# Altium PCB Power.PcbDoc
Units mil, origin at the board's own origin, x right, y up, seen from the top; angles counter-clockwise.
Board outline 2755.91 x 2165.35 mil, 2 copper layers (Top Layer, Bottom Layer), stack 21 mil thick; 115 components, 62 nets, 289 pads, 583 vias.
Unrouted connection lines stored in the file: 32.
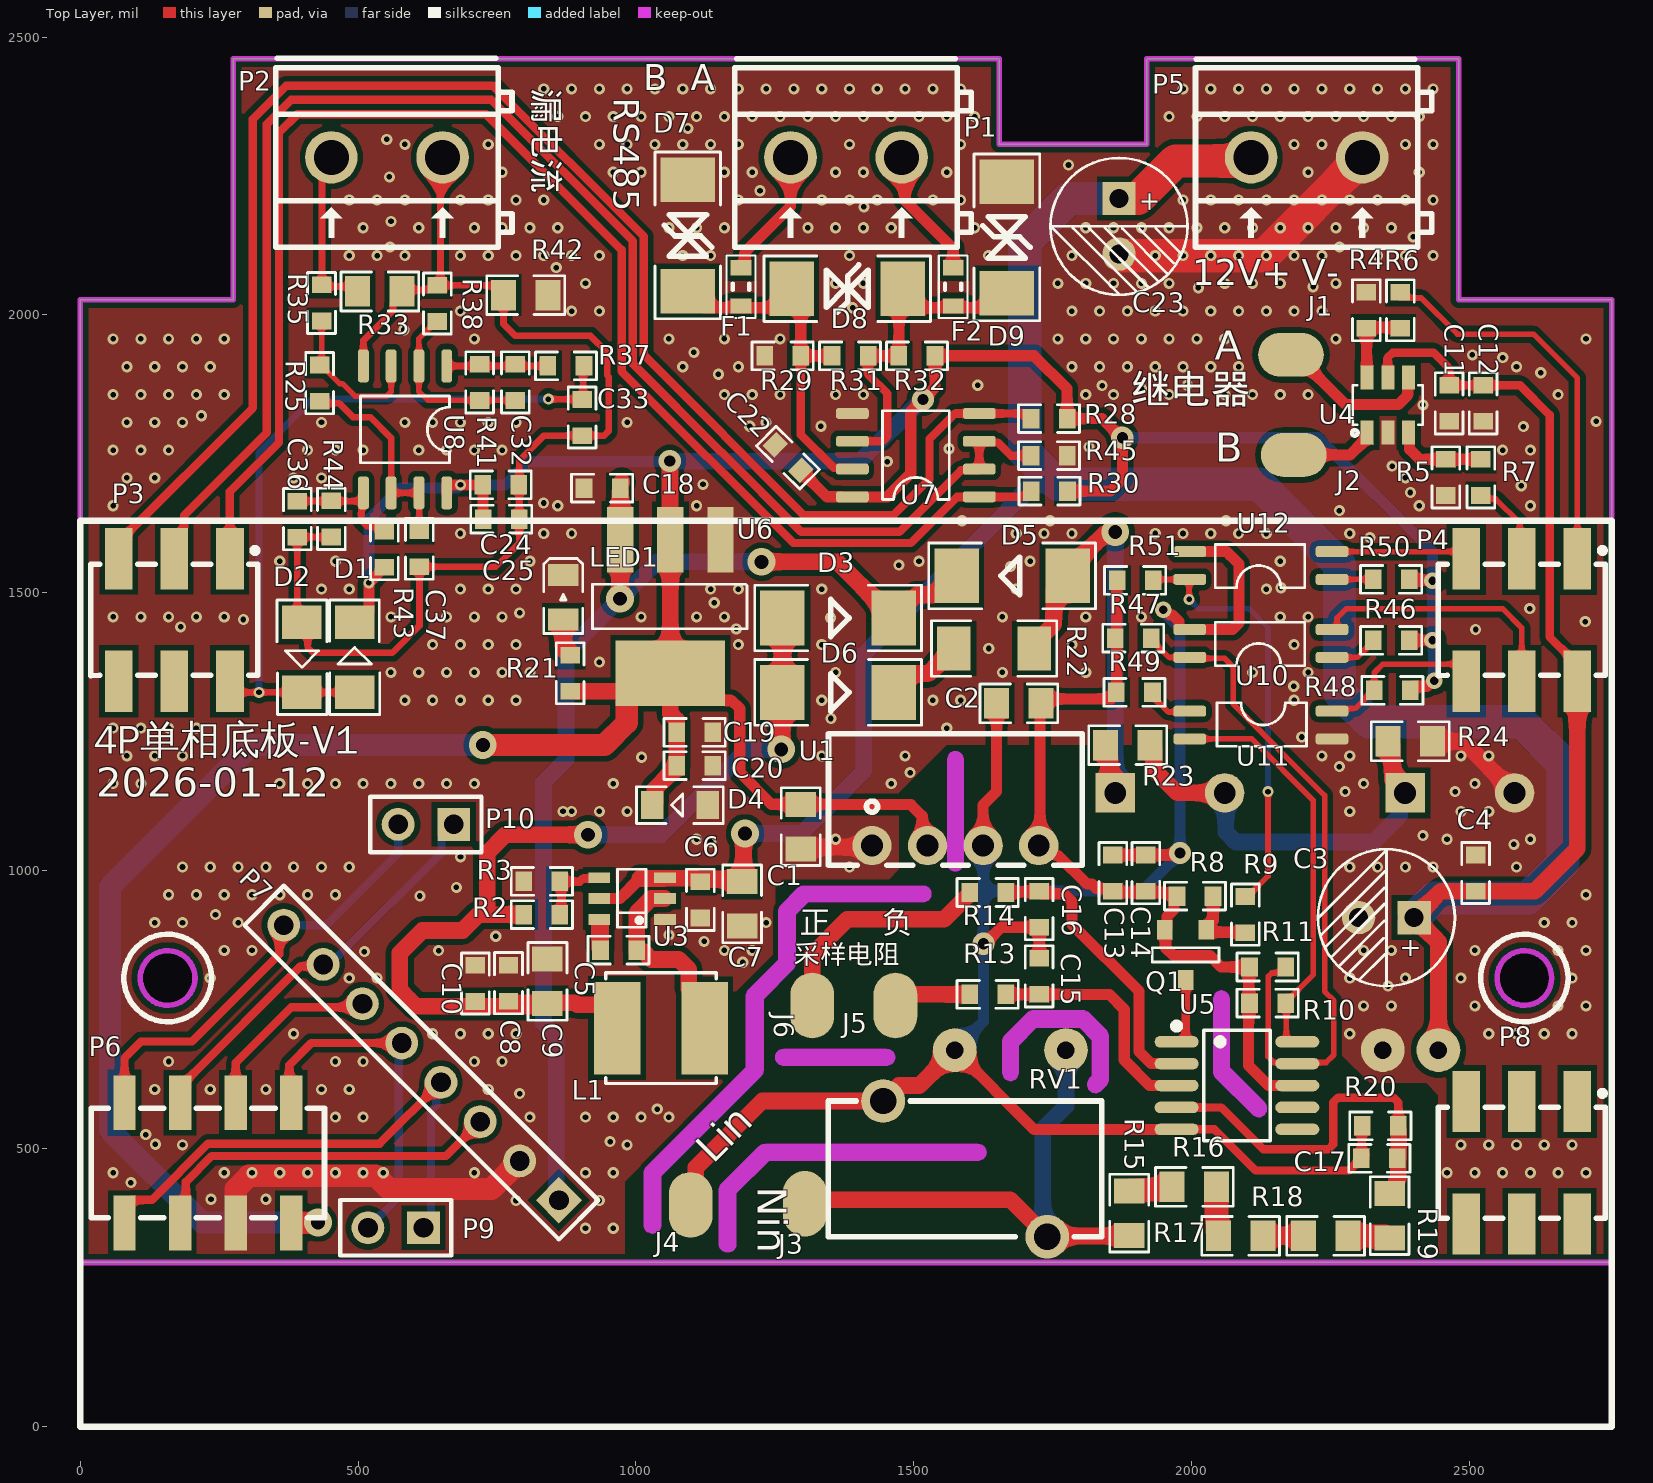
[diagram p0: Top Layer view]
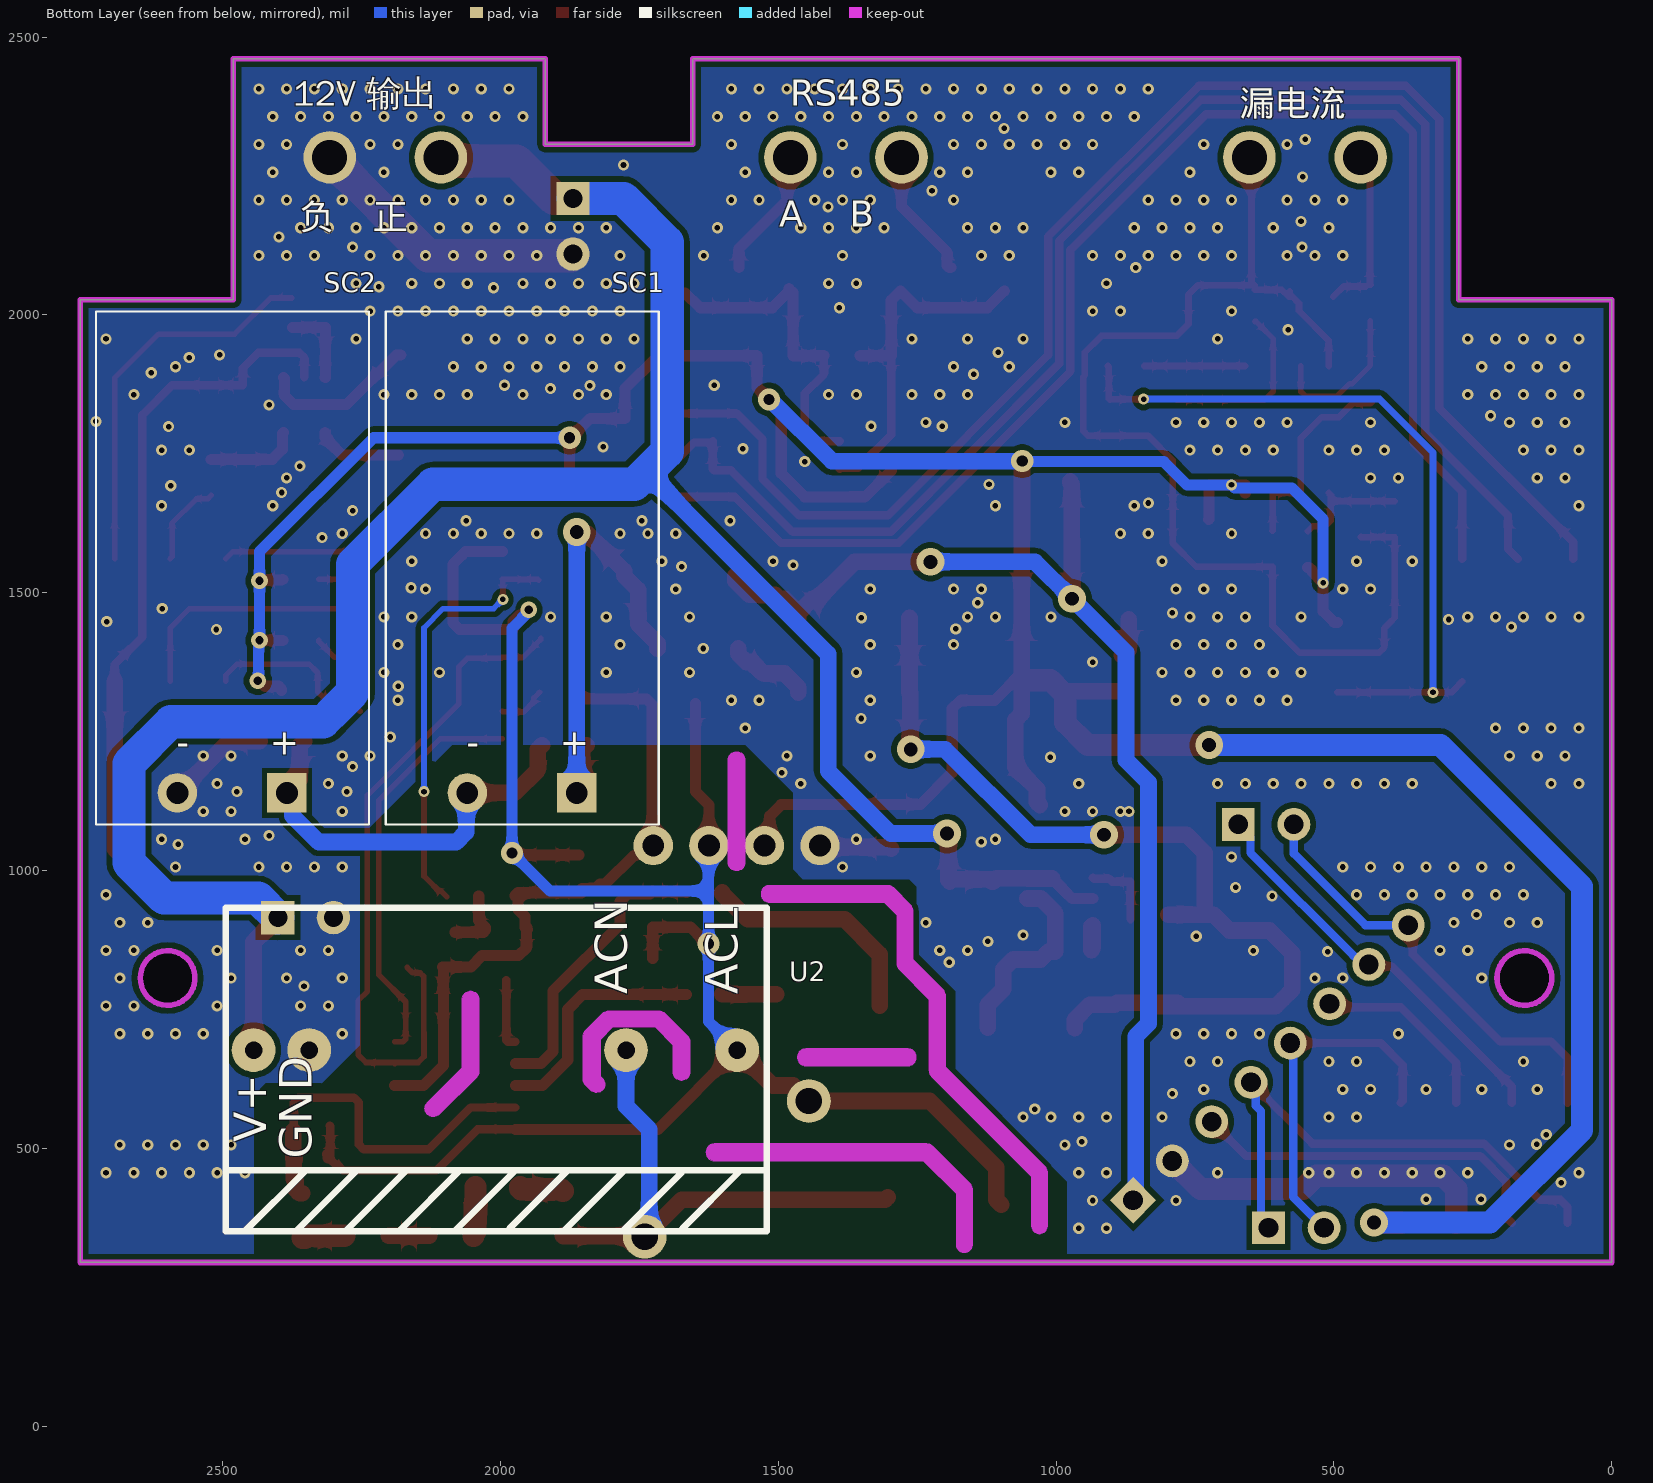
[diagram p1: Bottom Layer view, seen from below]

## Layer stack, top to bottom
Top Solder: solder mask 0.4, Solder Resist, Dk 3.5
Top Layer: signal copper 1.4
Dielectric 2: prepreg 2.8, Composite dielectric, Dk 4.1
Dielectric 1: prepreg 12.6, Composite dielectric, Dk 4.1
Dielectric 3: prepreg 2.8, Composite dielectric, Dk 4.1
Bottom Layer: signal copper 1.4
Bottom Solder: solder mask 0.4, Solder Resist, Dk 3.5

## Board outline
0,295.28 0,2027.56 275.59,2027.56 275.59,2460.63 1653.54,2460.63 1653.54,2307.45 1918.79,2307.45 1918.79,2460.13 1919.3,2460.63 2480.31,2460.63 2480.31,2027.56 2755.91,2027.56 2755.91,295.28
cut-out: 1266.11,649.41 cw(c1266.11,664.43) 1266.11,679.44 1450.78,679.44 cw(c1450.78,664.43) 1465.8,664.43 cw(c1450.78,664.43) 1450.78,649.41
cut-out: 1150.02,328.36 1150.02,426.19 cw(c1165.04,426.19) 1154.43,436.82 1154.42,436.81 1221.75,504.14 1221.74,504.13 cw(c1232.37,493.53) 1232.37,508.54 1614.92,508.54 cw(c1614.92,493.53) 1629.94,493.53 cw(c1614.92,493.53) 1614.92,478.51 1238.59,478.51 1180.05,419.97 1180.05,328.36 cw(c1165.04,328.36)
cut-out: 1014.91,362.36 1014.91,456.93 cw(c1029.93,456.93) 1019.33,467.56 1019.31,467.54 1198.61,646.84 1198.61,775.08 cw(c1213.62,775.08) 1203.02,785.71 1203,785.7 1256.88,839.57 1256.88,927.4 cw(c1271.89,927.4) 1261.29,938.03 1261.27,938.02 1292.34,969.08 1292.32,969.07 cw(c1302.95,958.46) 1302.95,973.48 1515.77,973.48 cw(c1515.77,958.46) 1530.78,958.46 cw(c1515.77,958.46) 1515.77,943.45 1309.17,943.45 1286.91,921.18 1286.91,833.35 cw(c1271.89,833.35) 1282.49,822.72 1282.51,822.73 1228.64,768.86 1228.64,640.62 cw(c1213.62,640.62) 1224.23,629.99 1224.24,630 1044.94,450.71 1044.94,362.36 cw(c1029.93,362.36)
cut-out: 1559.76,1014.84 ccw(c1574.78,1014.84) 1589.79,1014.84 1589.79,1199.45 ccw(c1574.78,1199.45) 1559.76,1199.45
cut-out: 1658.98,637.64 ccw(c1674,637.64) 1689.01,637.64 1689.01,686.53 1720.57,718.08 1798.59,718.08 1820.42,696.26 1820.42,630.76 1816.24,626.58 ccw(c1826.86,615.96) 1837.47,605.34 1846.05,613.92 1846.04,613.91 ccw(c1835.44,624.54) 1850.45,624.54 1850.45,702.48 ccw(c1835.44,702.48) 1846.04,713.11 1846.05,713.09 1815.43,743.72 1815.44,743.7 ccw(c1804.81,733.1) 1804.81,748.11 1714.35,748.11 ccw(c1714.35,733.1) 1703.72,743.7 1703.73,743.72 1663.38,703.37 1663.39,703.38 ccw(c1674,692.75) 1658.98,692.75
cut-out: 2038.32,639.5 ccw(c2053.33,639.5) 2042.73,628.87 2042.71,628.88 2109.75,561.84 ccw(c2120.37,572.46) 2135.38,572.46 ccw(c2120.37,572.46) 2130.99,583.08 2068.35,645.72 2068.35,768.86 ccw(c2053.33,768.86) 2038.32,768.86
cut-out: 108.27,807.09 ccw(c157.48,807.09) 157.48,757.87 ccw(c157.48,807.09) 206.69,807.09 ccw(c157.48,807.09) 157.48,856.3 ccw(c157.48,807.09)
cut-out: 2549.21,807.09 ccw(c2598.43,807.09) 2598.43,757.87 ccw(c2598.43,807.09) 2647.64,807.09 ccw(c2598.43,807.09) 2598.43,856.3 ccw(c2598.43,807.09)

## Design rules (kind name [scope] priority, off if disabled: settings)
Clearance "Via to pad" [IsVia vs IsPad] p1: gap=10 ignorepadtopadclearanceinfootprint=FALSE
Clearance Ploy [InPoly] p2: gap=10 ignorepadtopadclearanceinfootprint=FALSE
Clearance "Track to pad" [IsTrack vs IsPad] p3: gap=8 ignorepadtopadclearanceinfootprint=FALSE
Clearance "Track to track" [IsTrack vs IsTrack] p4: gap=5 ignorepadtopadclearanceinfootprint=FALSE
Clearance "Via to Track" [IsVia vs IsTrack] p5: gap=10 ignorepadtopadclearanceinfootprint=FALSE
Clearance "Via To Via" [IsVia vs IsVia] p6: gap=10 ignorepadtopadclearanceinfootprint=FALSE
ComponentClearance [All] p1: gap=0 collisioncheckmode=3 verticalgap=0 showdistances=FALSE
DiffPairsRouting [All] p1: maxlimit=10 minlimit=7 mostfreqgap=7 toplayer_minwidth=5 toplayer_maxwidth=100 toplayer_prefwidth=7 bottomlayer_minwidth=5 bottomlayer_maxwidth=100 bottomlayer_prefwidth=7 maxuncoupledlength=500
HoleSize [All] p1: absolutevalues=TRUE maxlimit=200 minlimit=1 maxpercent=80.000 minpercent=20.000
HoleToHoleClearance [All] p1: gap=5 allowstackedmicrovias=TRUE
MinimumSolderMaskSliver [All] p1: minsoldermaskwidth=0
PolygonConnect [All vs (InPadClass('All Pads'))] p1: connectstyle=Direct reliefconductorwidth=10 reliefentries=4 polygonreliefangle="90 Angle" airgapwidth=10
PolygonConnect GND焊盘 [InNet('GND_1') vs (InPadClass('All Pads'))] p2: connectstyle=Relief reliefconductorwidth=10 reliefentries=4 polygonreliefangle="90 Angle" airgapwidth=10
PolygonConnect GND过孔 [All vs IsVia] p3: connectstyle=Direct reliefconductorwidth=10 reliefentries=4 polygonreliefangle="90 Angle" airgapwidth=10
RoutingVias RoutingVias_1 [InNet('AGND_1')] p1: holewidth=10 width=20 viastyle="Through Hole" minholewidth=10 minwidth=20 maxholewidth=28 maxwidth=50
RoutingVias [All] p2: holewidth=10 width=20 viastyle="Through Hole" minholewidth=10 minwidth=20 maxholewidth=28 maxwidth=50
SilkToSilkClearance [All] p1: silktosilkclearance=0
SilkToSolderMaskClearance [IsPad] p1: minsilkscreentomaskgap=0 clearancetoexposedcopper=TRUE
SolderMaskExpansion [All] p1: expansion=1 istentingtop=FALSE
Width [All] p1: maxlimit=300 minlimit=5 preferedwidth=7 minimp=50.000000 maximp=50.000000 favimp=50.000000
23 further rules are at their usual default settings.

## Classes and differential pairs
component class RS485: C22 D7 D8 D9 F1 F2 P1 R28 R29 R30 R31 R32 R45 U7
component class 漏电流检测: C24 C25 C32 C33 C36 C37 D1 D2 P2 R25 R33 R35 R37 R38 R41 R42 R43 R44 U8
component class 连接: P3 P4 P6 P7 P8 P10
component class 继电器: C11 C12 J1 J2 R4 R5 R6 R7 U4
component class Power: C3 C4 C5 C6 C7 C8 C9 C10 C18 C19 C20 C23 D3 D4 D5 D6 L1 LED1 P5 R2 R3 R21 R22 R23 R24 SC1 SC2 U2 U3 U6
component class 计量: C1 C2 C13 C14 C15 C16 C17 J3 J4 J5 J6 Q1 R8 R9 R10 R11 R13 R14 R15 R16 R17 R18 R19 R20 R46 R47 R48 R49 R50 R51 RV1 U1 U5 U10 U11 U12

## Components (designator, comment, footprint, x,y, rotation, side; value= is the part's Value field where it differs from the comment)
C1 "4.7uF/25V" 0805R 1296.5,1119.49 r270 top
C2 "10uF/25V" 0805R 1729,1301.28 r180 top
C3 "100uF/25V" CAPPIND06 2400.2,915.67 r180 top
C4 "104/25V" 0603R 2510.58,1028.46 r270 top
C5 "104/25V" 0603R 1001.2,857.27 r180 top
C6 "10uF/25V" 0603R 1115.88,915.16 r90 top
C7 "22uF/25V" 0805R 1191.02,980.46 r270 top
C8 "10uF/25V" 0603R 770.74,830.27 r270 top
C9 "47uF/10V" 0805R 840.79,760.9 r90 top
C10 "104/10V" 0603R 711.19,829.84 r270 top
C11 "22uF/25V" 0603R 2463.03,1808.51 r90 top
C12 "104/25V" 0603R 2524.07,1808.51 r90 top
C13 "104/25V" 0603R 1858.13,1028.37 r270 top
C14 "10uF/25V" 0603R 1917.47,1028.37 r270 top
C15 "68nF/10V" 0603R 1725.61,777.58 r90 top
C16 "68nF/10V" 0603R 1725.61,963.46 r270 top
C17 "10nF/10V" 0603R 2369.91,482.47 r180 top
C18 "10uF/10V" 0603R 906.64,1688.37 r0 top
C19 "10uF/10V" 0603R 1138.16,1248.94 r180 top
C20 "104/10V" 0603R 1138.16,1189.09 r180 top
C22 "0.1uf/10V" 0603R 1296.5,1720.31 r135 top
C23 "100uF/25V" CAPPIND06 1869.07,2209.4 r270 top
C24 "10uF" 0603R 789.36,1694.25 r180 top
C25 "0.1uF" 0603R 790.23,1632.55 r180 top
C32 "0.1uF" 0603R 783.03,1846.22 r90 top
C33 "0.1uF" 0603R 903.25,1847.94 r270 top
C36 "100nF/16V" 0603R 390.78,1665.05 r270 top
C37 "100nF/16V" 0603R 610.51,1611.92 r270 top
D1 "1N4148" 1206D 494.03,1383.98 r90 top
D2 "1N4148" 1206D 399.03,1383.98 r270 top
D3 "SS34" DO-214AC 1463.62,1454.75 r0 top
D4 "SD03C" SOD323 1029.18,1118.21 r180 top
D5 "SS34" DO-214AC 1576.86,1530.61 r180 top
D6 "SS34" DO-214AC 1463.62,1320.89 r0 top
D7 "SMAJ6.8CA" "DO-214AC 双极性" 1093.29,2143.07 r90 top
D8 "SMAJ6.8CA" "DO-214AC 双极性" 1380.2,2047.12 r180 top
D9 "SMAJ6.8CA" "DO-214AC 双极性" 1667.31,2139.42 r270 top
F1 "60V 100mA" R0603 1189.06,2050.71 r90 top
F2 "60V 100mA" R0603 1570.73,2050.71 r90 top
J1 "J1" 贴片焊盘V1（3*2椭圆） 2178.45,1928.28 r0 top
J2 "J1" 贴片焊盘V1（3*2椭圆） 2183.55,1748.28 r0 top
J3 "J1" 贴片焊盘V1（3*2椭圆） 1303.86,400.95 r90 top
J4 "J1" 贴片焊盘V1（3*2椭圆） 1098.46,398.9 r90 top
J5 "J1" 贴片焊盘V1（3*2椭圆） 1466.89,757.63 r90 top
J6 "J1" 贴片焊盘V1（3*2椭圆） 1317.31,757.63 r90 top
L1 "4.7uH/3A" 贴片电感5020 1123.69,716.9 r0 top
LED1 "LED" 0603LED 869.28,1452.06 r90 top
P1 "Header 2" CONN-TH_P5.08_KF127-5.08-2P 1378.09,2283.58 r0 top locked
P2 "Header 2" CONN-TH_P5.08_KF127-5.08-2P 552.03,2283.58 r0 top locked
P3 "Header 3X2" CONN-SMD_5BME8-08872-203-W0 169.53,1451.26 r180 top
P4 "Header 3X2" CONN-SMD_5BME8-08872-203-W0 2593.69,1451.26 r180 top
P5 "Header 2" CONN-TH_P5.08_KF127-5.08-2P 2206.76,2283.58 r0 top locked
P6 "Header 4X2" CONN-SMD_5BME8-08872-204-W0 229.92,474.57 r180 top
P7 "Header 8" HDR1X8 861.48,407.25 r135 top
P8 "Header 3X2" CONN-SMD_5BME8-08872-203-W0 2593.69,474.57 r180 top
P9 "Header 2" HDR1X2 617.87,357.8 r180 top
P10 "Header 2" HDR1X2 672.15,1083.46 r180 top
Q1 "AO3401" SOT-23 2026.36,893.98 r180 top
R2 "60.4K" 0603R 798.17,921.14 r0 top
R3 "103" 0603R 863.17,980.84 r180 top
R4 "4.7K/5%" 0603R 2313.99,2040.92 r270 top
R5 "4.7K/5%" 0603R 2457,1675.26 r90 top
R6 "100R/5%" 0603R 2375.25,2040.92 r270 top
R7 "100R/5%" 0603R 2520.12,1740.26 r270 top
R8 "47K/5%/0603" 0603R 2038.3,954.34 r180 top
R9 "4.7K/5%/0603" 0603R 2096.47,888.67 r90 top
R10 "2K/5%/0603" 0603R 2168.98,761.75 r180 top
R11 "2K/5%/0603" 0603R 2168.98,826.93 r180 top
R13 "510R/1%" 0603R 1600.4,777.58 r0 top
R14 "510R/1%" 0603R 1600.39,960.96 r0 top
R15 "390K" 0805R 1887.63,423.95 r270 top
R16 "390K" 0805R 2044.64,431.33 r180 top
R17 "390K" 0805R 2127.88,343.2 r180 top
R18 "390K" 0805R 2280.84,343.21 r180 top
R19 "390K" 0805R 2355.99,419.71 r270 top
R20 "510R/1%" 0603R 2306.71,541.28 r0 top
R21 "1K/5%/0603" 0603R 881.64,1322.92 r90 top
R22 "4.99R/2W" 1206 1716.95,1399.87 r180 top
R23 "270K/1%/0805" 0805R 1924.86,1226.02 r180 top
R24 "270K/1%/0805" 0805R 2433.08,1233.01 r180 top
R25 "300K/1%/0603" 0603r 430.97,1844.95 r90 top
R28 "4.7K/5%/0603" 0603R 1710.74,1813.47 r0 top
R29 "1K/5%/.0603" 0603R 1231.5,1926.51 r0 top
R30 "4.7K/5%/0603" 0603R 1711.5,1683.07 r0 top
R31 "120R/5%/0603" 0603R 1352.73,1926.51 r0 top
R32 "1K/5%/0603" 0603R 1473.14,1926.51 r0 top
R33 "100R/1%" 0805R 579.34,2042.35 r180 top
R35 "1K/1%/0603" 0603r 434.38,1989.12 r90 top
R37 "100R/1%/0603" 0603r 906.64,1908.25 r180 top
R38 "1K/1%/0603" 0603r 642.83,1988.2 r90 top
R41 "300K/1%/0603" 0603r 718.85,1911.22 r270 top
R42 "0R/5%/0805" 0805R 841.78,2035.61 r180 top
R43 "20K/1%/0603" 0603r 547.28,1545.91 r90 top
R44 "20K/1%/0603" 0603r 451.93,1665.57 r270 top
R45 "47K/5%/0603" 0603R 1710.74,1746.78 r0 top
R46 "471" 0603R 2391.25,1414.61 r180 top
R47 "102" 0603R 1927.32,1418.4 r180 top
R48 "102" 0603R 2328.3,1324.44 r0 top
R49 "471" 0603R 1864.41,1320.89 r0 top
R50 "471" 0603R 2391.25,1524.26 r180 top
R51 "102" 0603R 1930.71,1522.33 r180 top
RV1 "7S561K" 10D821K 1592.4,463.76 r180 top
SC1 "10F/2.7V" "SuperCap-12.5*20 - 躺着" 1960.88,1140.13 r0 bottom locked
SC2 "10F/2.7V" "SuperCap-12.5*20 - 躺着" 2482.41,1140.13 r0 bottom locked
U1 "B0303S" B1205S-1WR3 -229.52,1102.52 r0 top
U2 "X1071    90-240V" X1071 1573.75,677.45 r0 bottom locked
U3 "DIO6930" SOT-23-6DBV 1052.09,912.66 r90 top
U4 "BL8023FCBT6R" SOT-23-6 2315.4,1788.87 r0 top
U5 "BL0942" BL0942-10pin 1972.78,692.37 r270 top
U6 "BL1117-33CX" SOT-223 1152.1,1595.34 r180 top
U7 "BL3085" SO8 1617.75,1672.75 r180 top
U8 "LMV358" SO8 659.66,1908.25 r270 top
U10 "EL3H7" EL3H7 2252.37,1384.07 r180 top
U11 "EL3H7" EL3H7 1996.45,1287.18 r0 top
U12 "EL3H7" EL3H7 2252.37,1524.26 r180 top

## Footprints (in the part's own frame and the unit in brackets; to place one, negate y for a bottom-side part, rotate by r counter-clockwise, add the part's x,y. Pads: shape width x height; smd on the part's side, far side on the other; paste and mask are expansions set on the pad)
10D821K [mm]
  round 2 hole 1.2 copper offset 0,0: 1(-3.75,3.1) 2(3.75,-3.1)
  silkscreen extent -6.25,-3.1 6.25,3.1
0603LED [mm]
  rect 1x1.4 smd: 1(0,0) 2(2.032,0)
  silkscreen extent -0.64,-0.89 2.79,0.89
0603R [mil]
  rect 30x35 smd: 1(0,0) 2(65,0)
  silkscreen extent -23,-25 88,25
0603r [mil]
  rect 30x35 smd: 1(0,0) 2(65,0)
  silkscreen extent -22,-25 88,25
0805R [mil]
  rect 45x55 smd: 1(0,0) 2(80,0)
  silkscreen extent -30,-35 110,35
1206 [mil]
  rect 60x78.74 smd: 1(0,0) 2(145,0)
  silkscreen extent -40,-50 185,50
1206D [mm]
  rect 1.524x1.8 smd: 1(1.6,0) 2(-1.6,0)
  silkscreen extent -2.62,-1.14 2.62,1.14
B1205S-1WR3 [mm]
  round 1.8 hole 1: 1(42.019,-1.451) 2(44.559,-1.451) 3(47.099,-1.451) 4(49.639,-1.451)
  silkscreen extent 40.03,-2.35 51.63,3.65
BL0942-10pin [mm]
  oval 0.525x2.014 smd: 1(0,0) 2(1,0) 3(2,0) 4(3,0) 5(4,0) 6(4,5.513) 7(3,5.513) 8(2,5.513) 9(1,5.513) 10(0,5.513)
  silkscreen extent -0.86,-0.15 4.53,4.28
CAPPIND06 [mil]
  rect 60x60 hole 34: 1(0,0)
  round 60 hole 34: 2(100,0)
  silkscreen extent -73,-123 173,123
CONN-SMD_5BME8-08872-203-W0 [mm]
  rect 1.27x2.8 smd paste+0.051: 1(-2.54,-2.8) 2(-2.54,2.8) 3(0,-2.8) 4(0,2.8) 5(2.54,-2.8) 6(2.54,2.8)
  silkscreen extent -3.81,-3.3 3.81,2.54
CONN-SMD_5BME8-08872-204-W0 [mm]
  rect 1.02x2.5 smd paste+0 mask+0.05: 1(-3.81,-2.75) 2(-3.81,2.75) 3(-1.27,-2.75) 4(-1.27,2.75) 5(1.27,-2.75) 6(1.27,2.75) 7(3.81,-2.75) 8(3.81,2.75)
  silkscreen extent -5.33,-2.5 5.33,2.5
CONN-TH_P5.08_KF127-5.08-2P [mm]
  round 2.4 hole 1.6 paste+0.051: 1(-2.54,0) 2(2.54,0)
  silkscreen extent -5.08,-4.1 5.71,4.1
DO-214AC [mil]
  rect 80x98.43 smd: 1(0,0) 2(-200,0)
  silkscreen extent -250,-59 50,59
"DO-214AC 双极性" [mil]
  rect 80x98.43 smd: 1(100,0) 2(-100,0)
  silkscreen extent -150,-59 150,59
EL3H7 [mm]
  rrect50% 1.5x0.5 smd: 1(0,0) 2(0,-1.27) 3(6.5,-1.27) 4(6.5,0)
  silkscreen extent 1.24,-1.6 5.33,0.38
HDR1X2 [mm] "Connector; Header; 2 Position"
  rect 1.5x1.5 hole 0.9: 1(0,0)
  round 1.5 hole 0.9: 2(2.54,0)
  silkscreen extent -1.27,-1.27 3.81,1.27
HDR1X8 [mm] "Connector; Header; 8 Position"
  rect 1.5x1.5 hole 0.9: 1(0,0)
  round 1.5 hole 0.9: 2(2.54,0) 3(5.08,0) 4(7.62,0) 5(10.16,0) 6(12.7,0) 7(15.24,0) 8(17.78,0)
  silkscreen extent -1.27,-1.27 19.05,1.27
R0603 [mm] "Chip Capacitor, 2-Leads, Body 1.60x0.80mm, IPC Medium Density"
  rect 0.7x0.95 smd: 1(-0.875,0) 2(0.875,0)
  silkscreen extent -1.42,-0.66 1.42,0.66, body extent -0.8,-0.4 0.8,0.4, height 0.9
SO8 [mm]
  rrect50% 1.5x0.5 smd: 1(0,0) 2(0,-1.27) 3(0,-2.54) 4(0,-3.81) 5(5.8,-3.81) 6(5.8,-2.54) 7(5.8,-1.27) 8(5.8,0)
  silkscreen extent 1.38,-3.94 4.42,0.13
SOD323 [mil]
  rect 40x50 smd: 1(0,0) 2(-100,0)
  silkscreen extent -128,-33 28,33
SOT-23 [mm]
  rect 0.7x0.9 smd: 1(0,0) 2(1.9,0) 3(0.95,2.3)
  silkscreen extent -0.57,0.82 2.47,1.47
SOT-23-6 [mm]
  rect 0.6x1.1 smd: 1(0,0) 2(0.95,0) 3(1.9,0) 4(1.9,2.5) 5(0.95,2.5) 6(0,2.5)
  silkscreen extent -0.69,-0.15 2.55,2.15
SOT-23-6DBV [mm]
  rect 0.5x1 smd: 1(0,0) 2(0.95,0) 3(1.9,0) 4(1.9,3) 5(0.95,3) 6(0,3)
  silkscreen extent -0.37,0.86 2.29,2.16
SOT-223 [mm]
  rect 1.2x3 smd: 1(0,0) 2(2.29,0) 3(4.58,0)
  rect 5x3 smd: 2(2.29,6.096)
  silkscreen extent -1.21,2.03 5.85,4.06
"SuperCap-12.5*20 - 躺着" [mm]
  rect 1.8x1.8 hole 1: 1(-2.5,0)
  round 1.8 hole 1: 2(2.5,0)
  silkscreen extent -6.25,-22 6.22,1.45
X1071 [mm]
  round 2 hole 0.8: 1(0,0) 2(5.08,0) 4(19.56,0) 5(22.1,0)
  silkscreen extent -1.36,-6.5 23.38,8.28
贴片焊盘V1（3*2椭圆） [mm]
  oval 3x2 smd: 1(0,0)
贴片电感5020 [mm]
  rect 2.124x4.22 smd: 1(0,0) 2(-4,0)
  silkscreen extent -4.53,-2.53 0.53,2.53

## Part data
C1 C2 SC1 SC2: library part CAP+
C3 C7 C9 C23: library part "Cap Pol1", "Polarized Capacitor (Radial)", LatestRevisionDate=17-Jul-2002, LatestRevisionNote="Re-released for DXP Platform.", PackageDescription="Polarized Capacitor (Radial); 2 Leads", PackageReference=RB7.6-15, Published=8-Jun-2000, Publisher="Altium Limited"
C4 C5 C10 C11 C12 C13 C14 C20: library part CAP_1
C6 C8 C15 C16 C17 C18 C19 C22 C24 C25 C32 C33 C36 C37: library part CAP
D1 D2 D3 D5 D6: library part DIODE
D4 D7 D8 D9: library part TVS
F1 F2: library part FUSE
L1: library part Inductor, "Inductor", Code_IEC=1005, Code_JEITA=0402, LatestRevisionDate=29-May-2009, LatestRevisionNote="IPC-7351 Footprint Added.", PackageDescription="Chip Inductor", PackageReference=0402-A, Published=8-Jun-2000, Publisher="Altium Limited"
P1 P2 P5 P9 P10: "Header, 2-Pin", LatestRevisionDate=17-Jul-2002, LatestRevisionNote="Re-released for DXP Platform.", Publisher="Altium Limited"
P3 P4 P8: "Header, 3-Pin, Dual row", LatestRevisionDate=17-Jul-2002, LatestRevisionNote="Re-released for DXP Platform.", Publisher="Altium Limited"
P6: "Header, 4-Pin, Dual row", LatestRevisionDate=17-Jul-2002, LatestRevisionNote="Re-released for DXP Platform.", Publisher="Altium Limited"
P7: "Header, 8-Pin", LatestRevisionDate=17-Jul-2002, LatestRevisionNote="Re-released for DXP Platform.", Publisher="Altium Limited"
Q1: library part PNP
R2 R3 R22 R23 R24: library part Res2, "Resistor", LatestRevisionDate=17-Jul-2002, LatestRevisionNote="Re-released for DXP Platform.", PackageDescription="Axial Device, Thru-Hole; 2 Leads; 0.4 in Pin Spacing", PackageReference=AXIAL-0.4, Published=8-Jun-2000, Publisher="Altium Limited"
R4 R5 R6 R7 R8 R9 R10 R11 R13 R14 R15 R16 R17 R18 R19 R20 R21 R25 R28 R29 R30 R31 R32 R33 R35 R37 R38 R41 R42 R43 R44 R45 R46 R47 R48 R49 R50 R51: library part RES
RV1: library part "Res Varistor", "Varistor (Voltage-Sensitive Resistor)", Code_IPC=RESC2012, LatestRevisionDate=29-May-2009, LatestRevisionNote="IPC-7351 Footprint Added.", PackageDescription="Chip Resistor 0805 Case Size", PackageReference=6-0805, PackageVersion=Mar-2003, Published=24-Mar-1999, Publisher="Altium Limited"
U1: library part B0505S
U2: library part AD2DC_EMC
U3: library part BL8032
U4: library part BL8023HCB6TR, JLCPCB Part Class="Extended Part", LCSC Part Name="BL8023HCB6TR 继电器驱动芯片 停产", Manufacturer=BL(上海贝岭), Add into BOM=yes, Convert to PCB=yes, Datasheet=https://atta.szlcsc.com/upload/public/pdf/source/20190920/C431145_DEC39E836DB2A2F1462A8BB350F12ABB.pdf, Device=BL8023HCB6TR, Manufacturer Part=BL8023HCB6TR, Supplier=LCSC, Supplier Footprint=SOT-23-6, Supplier Part=C431145, Symbol=BL8023HCB6TR
U5: library part BL0942_C2837510, JLCPCB Part Class="Extended Part", LCSC Part Name=BL0942内置时钟免校准计量芯片, Manufacturer=BL(上海贝岭), Add into BOM=yes, Convert to PCB=yes, Datasheet=https://atta.szlcsc.com/upload/public/pdf/source/20220627/BFAD44701CA6DE9A8853C5A4834B6884.pdf, Device=BL0942_C2837510, Manufacturer Part=BL0942, Supplier=LCSC, Supplier Footprint=SSOP-10-150mil, Supplier Part=C2837510, Symbol=BL0942
U6: library part AMS1117
U7: library part MAX485
U8: library part LM358
U10 U11 U12: library part Optical_Coupler_1

## Via types
v1: diameter 20, hole 10, Top Layer to Bottom Layer, 566 vias
v2: diameter 50, hole 25, Top Layer to Bottom Layer, 8 vias
v3: diameter 40, hole 20, Top Layer to Bottom Layer, 5 vias
v4: diameter 30, hole 15, Top Layer to Bottom Layer, 4 vias

## Nets (pads, with @x,y where several pads share a name; then routed paths per layer and width w, separated by ;. In a path a pad name is that pad's centre, name@x,y a point inside that pad or via, vN(x,y) a via of type N, cw(c..) or ccw(c..) an arc to the next point about the centre after c; other vN are vias at no path point)
4G_MCU_RXD: P6.1 P7.5 P9.2 | length 645.3
  Top Layer w15: P6.1 376.4,586.36 376.4,650.59 415.9,690.09 P7.5
  Bottom Layer w15: P9.2 573.55,413.48 573.55,685.01 P7.5
4G_MCU_TXD: P6.8 P7.4 P9.1 | length 966
  Top Layer w15: P6.8 79.92,395.43 92.49,408.01 129.48,408.01 230.51,509.03 539,509.03 P7.4
  Bottom Layer w15: P9.1 631.36,371.29 631.36,567.82 640.92,577.38 640.92,610.95 P7.4
4G_Reset: P6.6 P7.3 | length 653.1
  Top Layer w15: P6.6 190.23,376.61 190.23,440.47 236.74,486.98 658.36,486.98 P7.3
485_A: F2.2 P1.2 | length 236.8
  Top Layer w20: P1.2 1484.27,2277.4 1484.27,2206.34 1570.73,2119.88 F2.2
485_B: F1.2 P1.1 | length 237.1
  Top Layer w20: F1.2 1192.14,2085.16 1195.92,2088.94 1195.92,2113.2 1278.09,2195.36 P1.1
AGND: C24.1 C25.1 C33.2 C36.2 C37.2 D2.2 P2.2 R33.1 R38.2 R42.2 R44.2 U8.4 | length 2120.4
  Top Layer w12: R44.2 451.67,1600.31 391.03,1600.31 C36.2 390.78,1455.23 D2.2 409.38,1436.63 409.38,1401.98 418.99,1392.37 561.76,1392.37 610.51,1441.13 C37.2 747.73,1546.92 790.23,1589.42 C25.1 790.23,1738.54 834.63,1782.94 C33.2 942.92,1782.94 950.9,1790.92 950.9,1888.72 948.35,1891.27 948.35,1932.51 918.42,1962.45 783.03,1962.45 761.78,1983.7 R42.2 761.78,2036.7 745.28,2053.2 R38.2@648.27,2053.2 ; U8.4 509.66,1954.34 562.84,2007.53 562.84,2020.85 574.63,2032.64 579.34,2032.64 R33.1 ; R33.1@581.52,2032.64 594.01,2045.14 R38.2@642.83,2045.14 ; R38.2 R38.2@648.27,2053.2 ; P2.2 648.27,2279.82 R38.2@648.27,2053.2
BL0942_Control: R9.2 R51.1 U12.4 | length 768.7
  Top Layer w10: R51.1 1932.64,1524.26 U12.4 1995.28,1523.07 v1(1995.28,1488.25) ; R9.2 2106.47,963.67 2110.42,963.67 2137.2,990.45 v1(2137.2,1142.44)
  Bottom Layer w10: v1(1995.28,1488.25) 2011.98,1471.55 2102.71,1471.55 2137.2,1437.06 v1(2137.2,1142.44)
BL0942_MCU_RXD: P4.6 R48.1 U11.4 | length 315.7
  Top Layer w10: U11.4 2257.2,1292.03 2294.5,1292.03 2314.42,1311.94 2318.3,1311.94 2328.3,1321.94 R48.1 2328.3,1356.33 2343.87,1371.91 2473.69,1371.91 2493.69,1351.91 P4.6
BL0942_MCU_TXD: P4.4 U10.2 | length 476.5
  Top Layer w10: U10.2 2256.4,1434.07 2261.24,1438.91 2261.24,1454.75 2278.04,1471.55 2559.2,1471.55 2593.69,1437.06 P4.4
BL0942_RXD: R11.1 R47.1 U5.9 U10.4 | length 1254.9
  Top Layer w10: R47.1 1927.32,1415.9 1959.15,1384.07 U10.4 1998.39,1382.14 2059.31,1382.14 2074.64,1366.81 2074.64,1300.27 2239.13,1135.77 2239.13,783.08 2255.84,766.37 2255.84,669.09 2241.8,655.04 2191.88,655.04 U5.9 2187.79,655.04 2147.77,655.04 2137.2,665.61 2137.2,709.08 2137.97,709.85 2137.97,810.19 2144.14,816.35 2157.41,816.35 2167.41,826.35 R11.1@2167.41,826.8
BL0942_TXD: R10.1 U5.10 U11.2 | length 739.2
  Top Layer w10: U11.2 2108.22,1237.18 2218.46,1126.95 2218.46,812.74 2170.07,764.36 2170.07,697.3 2175,692.37 U5.10
GND: C1.2 C3.2 C4.1 C6.1 C7.2 C8.1 C9.2 C10.1 C11.1 C12.1 C18.1 C19.1 C20.1 C22.2 C23.2 D4.2 D7.1 D9.2 LED1.2 P5.2 P6.4 P7.2 R3.2 R4.1 R5.1 R24.1 R29.1 R42.1 R45.2 SC2.2 U1.1 U2.4 U3.1 U4.2 U6.1 U7.5 U11.3 | length 1441.7
  Top Layer w30: C1.2 1299.45,1042.44 1421.81,1042.44 U1.1 ; R24.1 2487.96,1233.01 SC2.2
  Top Layer w40: P6.4 279.99,366.37 279.99,427.71 303.43,451.14 532.09,451.14 555.75,427.48 740.29,427.48 P7.2
  Top Layer w60: C23.2 1871.79,2106.68 2129.86,2106.68 P5.2
  other v1: 909.27,356.83 959.27,356.83 784.27,406.83 934.27,406.83 235.5,409 334.27,409 91.43,439 59.27,456.83 259.27,456.83 309.27,456.83 359.27,456.83 409.27,456.83 459.27,456.83 509.27,456.83 545.38,456.83 709.27,456.83 909.27,456.83 959.27,456.83 2459.27,456.83 2509.27,456.83 2559.27,456.83 2609.27,456.83 2659.27,456.83 2709.27,456.83 184.27,506.83 984.27,506.83 2484.27,506.83 2534.27,506.83 2584.27,506.83 2634.27,506.83 2684.27,506.83 135.5,508.07 953.7,512.86 118.21,525.36 459.27,556.83 509.27,556.83 809.27,556.83 909.27,556.83 959.27,556.83 1009.27,556.83 1059.27,556.83 1038.43,571.26 790.77,599.16 134.27,606.83 234.27,606.83 334.27,606.83 434.27,606.83 484.27,606.83 734.27,606.83 159.27,656.83 459.27,656.83 509.27,656.83 709.27,656.83 759.27,656.83 384.27,706.83 634.27,706.83 684.27,706.83 734.27,706.83 784.27,706.83 2284.27,706.83 2534.27,706.83 2584.27,706.83 2634.27,706.83 2684.27,706.83 2309.27,756.83 2359.27,756.83 2509.27,756.83 2659.27,756.83 2709.27,756.83 2353.08,792.47 234.27,806.83 484.27,806.83 534.27,806.83 2284.27,806.83 2384.27,806.83 2484.27,806.83 2684.27,806.83 1192.29,835.47 511.47,854.64 645.05,856.3 259.27,856.83 309.27,856.83 1159.27,856.83 1209.27,856.83 2309.27,856.83 2359.27,856.83 2509.27,856.83 2659.27,856.83 2709.27,856.83 1122.69,873.03 747.83,882.27 1059.27,884.38 134.27,906.83 184.27,906.83 284.27,906.83 1234.27,906.83 2634.27,906.83 2684.27,906.83 243.61,921.14 611.47,954.64 159.27,956.83 209.27,956.83 259.27,956.83 309.27,956.83 359.27,956.83 409.27,956.83 459.27,956.83 2709.27,956.83 676.94,970.12 184.27,1006.83 234.27,1006.83 284.27,1006.83 334.27,1006.83 384.27,1006.83 434.27,1006.83 484.27,1006.83 1384.27,1006.83 2284.27,1006.83 2334.27,1006.83 2384.27,1006.83 2434.27,1006.83 2584.27,1006.83 684.44,1025.11 2579.59,1047.51 1134.59,1051.85 1109.27,1056.83 1359.27,1056.83 2459.27,1056.83 2609.27,1056.83 2415.9,1063.33 868.81,1106.83 884.27,1106.83 934.27,1106.83 984.27,1106.83 2284.27,1106.83 2484.27,1106.83 2534.27,1106.83 2275.98,1142.44 2473.69,1142.44 59.27,1156.83 109.27,1156.83 359.27,1156.83 409.27,1156.83 459.27,1156.83 509.27,1156.83 559.27,1156.83 609.27,1156.83 659.27,1156.83 709.27,1156.83 959.27,1156.83 1459.27,1156.83 2309.27,1156.83 2509.27,1156.83 1493.23,1176.77 2265.7,1187.5 1010.16,1204.37 84.27,1206.83 134.27,1206.83 184.27,1206.83 1334.27,1206.83 1484.27,1206.83 2234.27,1206.83 2284.27,1206.83 2484.27,1206.83 2534.27,1206.83 2197.87,1240.7 59.27,1256.83 109.27,1256.83 159.27,1256.83 209.27,1256.83 1559.27,1256.83 1350.65,1273.94 584.27,1306.83 634.27,1306.83 684.27,1306.83 734.27,1306.83 784.27,1306.83 1334.27,1306.83 1534.27,1306.83 1584.27,1306.83 2184.27,1306.83 2183.55,1331.94 559.27,1356.83 609.27,1356.83 659.27,1356.83 709.27,1356.83 759.27,1356.83 809.27,1356.83 1359.27,1356.83 1659.27,1356.83 1809.27,1356.83 2109.27,1356.83 2209.27,1356.83 934.27,1375.5 1634.81,1399.87 634.27,1406.83 684.27,1406.83 734.27,1406.83 784.27,1406.83 1184.27,1406.83 1334.27,1406.83 1784.27,1406.83 2184.27,1406.83 2510.58,1434.07 1180.45,1435.34 180.79,1438.73 2707.95,1448.28 293.85,1452.06 1350.12,1455.25 59.27,1456.83 109.27,1456.83 159.27,1456.83 209.27,1456.83 259.27,1456.83 559.27,1456.83 659.27,1456.83 709.27,1456.83 759.27,1456.83 1009.27,1456.83 1109.27,1456.83 1159.27,1456.83 1659.27,1456.83 1809.27,1456.83 1909.27,1456.83 2159.27,1456.83 2209.27,1456.83 790.77,1463.96 2608.03,1471.55 1140.88,1482.32 434.27,1506.83 484.27,1506.83 684.27,1506.83 734.27,1506.83 784.27,1506.83 1134.27,1506.83 1184.27,1506.83 1334.27,1506.83 1684.27,1506.83 2134.27,1506.83 2160.37,1509.26 1673.61,1547.36 1473.09,1549.83 359.27,1556.83 459.27,1556.83 809.27,1556.83 1509.27,1556.83 1709.27,1556.83 2159.27,1556.83 2320.54,1599.29 684.27,1606.83 834.27,1606.83 884.27,1606.83 1684.27,1606.83 1734.27,1606.83 1784.27,1606.83 1934.27,1606.83 1984.27,1606.83 2034.27,1606.83 2084.27,1606.83 2134.27,1606.83 2284.27,1606.83 1586.48,1629.77 1745.04,1629.77 2061.29,1629.77 2265.7,1648 59.27,1656.83 859.27,1656.83 1109.27,1656.83 2409.27,1656.83 2609.27,1656.83 833.81,1661.72 2393.3,1680.57 2592.89,1692.76 1120.66,1695.28 84.27,1706.83 134.27,1706.83 384.27,1706.83 434.27,1706.83 2384.27,1706.83 2360.58,1728.07 1452.08,1736.22 59.27,1756.83 109.27,1756.83 159.27,1756.83 409.27,1756.83 459.27,1756.83 509.27,1756.83 609.27,1756.83 659.27,1756.83 709.27,1756.83 759.27,1756.83 2559.27,1756.83 2609.27,1756.83 1563.58,1759.28 1815.07,1762.76 2596.7,1799.09 1204.8,1799.86 1332.78,1799.86 84.27,1806.83 134.27,1806.83 184.27,1806.83 434.27,1806.83 584.27,1806.83 634.27,1806.83 684.27,1806.83 734.27,1806.83 784.27,1806.83 984.27,1806.83 1234.27,1806.83 2727.41,1808.51 218.21,1818.69 2415.79,1838.08 59.27,1856.83 109.27,1856.83 159.27,1856.83 209.27,1856.83 259.27,1856.83 1159.27,1856.83 1209.27,1856.83 1259.27,1856.83 1359.27,1856.83 1409.27,1856.83 1809.27,1856.83 1859.27,1856.83 1959.27,1856.83 2059.27,1856.83 2109.27,1856.83 2159.27,1856.83 2209.27,1856.83 2659.27,1856.83 1909.82,1867.35 1838.82,1872.8 1614.92,1873.51 1992.3,1873.51 1148.24,1893.24 2627.79,1896.01 84.27,1906.83 134.27,1906.83 184.27,1906.83 234.27,1906.83 1084.27,1906.83 1184.27,1906.83 1784.27,1906.83 1834.27,1906.83 1884.27,1906.83 1934.27,1906.83 1984.27,1906.83 2034.27,1906.83 2084.27,1906.83 2584.27,1906.83 2559.6,1923.12 2505,1928.28 1104.18,1932.51 59.27,1956.83 109.27,1956.83 159.27,1956.83 209.27,1956.83 259.27,1956.83 709.27,1956.83 1059.27,1956.83 1159.27,1956.83 1259.27,1956.83 1759.27,1956.83 1809.27,1956.83 1859.27,1956.83 1909.27,1956.83 1959.27,1956.83 2009.27,1956.83 2059.27,1956.83 2259.27,1956.83 2709.27,1956.83 582.67,1973.46 684.27,2006.83 884.27,2006.83 934.27,2006.83 1784.27,2006.83 1834.27,2006.83 1884.27,2006.83 1934.27,2006.83 1984.27,2006.83 2034.27,2006.83 2084.27,2006.83 2134.27,2006.83 2184.27,2006.83 2234.27,2006.83 1389.7,2013.02 2011.98,2048.9 2218.46,2050.71 909.27,2056.83 1359.27,2056.83 1409.27,2056.83 1759.27,2056.83 1809.27,2056.83 1859.27,2056.83 1909.27,2056.83 1959.27,2056.83 2059.27,2056.83 2109.27,2056.83 2159.27,2056.83 2259.27,2056.83 856.64,2085.16 484.27,2106.83 534.27,2106.83 584.27,2106.83 684.27,2106.83 734.27,2106.83 784.27,2106.83 834.27,2106.83 884.27,2106.83 934.27,2106.83 1084.27,2106.83 1134.27,2106.83 1384.27,2106.83 1634.27,2106.83 1784.27,2106.83 1934.27,2106.83 1984.27,2106.83 2034.27,2106.83 2084.27,2106.83 2134.27,2106.83 2184.27,2106.83 2234.27,2106.83 2334.27,2106.83 2384.27,2106.83 2434.27,2106.83 557.41,2122.16 2265.7,2122.17 2398.3,2140.42 509.27,2156.83 609.27,2156.83 709.27,2156.83 759.27,2156.83 809.27,2156.83 859.27,2156.83 1059.27,2156.83 1109.27,2156.83 1159.27,2156.83 1309.27,2156.83 1359.27,2156.83 1409.27,2156.83 1459.27,2156.83 1609.27,2156.83 1809.27,2156.83 1859.27,2156.83 1909.27,2156.83 1959.27,2156.83 2009.27,2156.83 2059.27,2156.83 2109.27,2156.83 2159.27,2156.83 2209.27,2156.83 2259.27,2156.83 2309.27,2156.83 2359.27,2156.83 559.36,2168.31 1410.12,2194.42 484.27,2206.83 534.27,2206.83 584.27,2206.83 684.27,2206.83 734.27,2206.83 784.27,2206.83 834.27,2206.83 1184.27,2206.83 1334.27,2206.83 1384.27,2206.83 1434.27,2206.83 1534.27,2206.83 1584.27,2206.83 1984.27,2206.83 2034.27,2206.83 2084.27,2206.83 2134.27,2206.83 2184.27,2206.83 2234.27,2206.83 2284.27,2206.83 2334.27,2206.83 2384.27,2206.83 2434.27,2206.83 1223.26,2223.4 556.34,2248.43 759.27,2256.83 959.27,2256.83 1009.27,2256.83 1159.27,2256.83 1209.27,2256.83 1359.27,2256.83 1409.27,2256.83 1559.27,2256.83 2209.27,2256.83 2409.27,2256.83 1778.29,2269.8 584.27,2306.83 734.27,2306.83 934.27,2306.83 984.27,2306.83 1034.27,2306.83 1084.27,2306.83 1134.27,2306.83 1184.27,2306.83 1384.27,2306.83 1584.27,2306.83 2184.27,2306.83 2234.27,2306.83 2384.27,2306.83 2434.27,2306.83 551.62,2315.83 1093.44,2335.58 859.27,2356.83 909.27,2356.83 959.27,2356.83 1009.27,2356.83 1059.27,2356.83 1109.27,2356.83 1159.27,2356.83 1209.27,2356.83 1259.27,2356.83 1309.27,2356.83 1359.27,2356.83 1409.27,2356.83 1459.27,2356.83 1509.27,2356.83 1559.27,2356.83 1609.27,2356.83 1959.27,2356.83 2009.27,2356.83 2059.27,2356.83 2109.27,2356.83 2159.27,2356.83 2209.27,2356.83 2259.27,2356.83 2309.27,2356.83 2359.27,2356.83 2409.27,2356.83 834.27,2406.83 884.27,2406.83 934.27,2406.83 984.27,2406.83 1034.27,2406.83 1084.27,2406.83 1134.27,2406.83 1184.27,2406.83 1234.27,2406.83 1284.27,2406.83 1334.27,2406.83 1384.27,2406.83 1434.27,2406.83 1484.27,2406.83 1534.27,2406.83 1584.27,2406.83 1984.27,2406.83 2034.27,2406.83 2084.27,2406.83 2134.27,2406.83 2184.27,2406.83 2234.27,2406.83 2284.27,2406.83 2334.27,2406.83 2384.27,2406.83 2434.27,2406.83
IN1: C16.1 R14.2 U5.2 | length 524.6
  Top Layer w20: R14.2 1666.64,962.21 1724.36,962.21 C16.1 1730.61,958.46 1770.89,958.46 1778.21,951.15 1784.86,944.49 1784.86,903.54 1905.1,783.3 1905.1,674.73 1926.7,653.13 1972.65,653.13 U5.2
IP1: C15.1 R13.2 U5.3 | length 428.7
  Top Layer w20: R13.2 C15.1 1851.59,777.58 1878.55,750.63 1878.55,659.41 1924.21,613.76 1972.65,613.76 U5.3
Lin: C2.2 C13.1 C14.1 C15.2 C16.2 C17.2 J4.1 R20.1 RV1.2 U1.3 U2.1 U5.5 U10.3 U12.3 | length 3627.6
  Top Layer w15: U5.5 2040.93,534.89 2114.91,460.91 2283.36,460.91 2294.91,472.47 2297.41,472.47 2304.91,479.97 C17.2 2305.81,483.37 2305.81,540.38 R20.1
  Top Layer w20: U2.1 1716.3,534.89 U5.5 ; U1.3 1624.77,1118.21 1649,1142.44 C2.2 ; v3(1625.41,868.66) 1628.11,868.66 1657.91,898.46 C16.2 C15.2 ; C13.1 C14.1 1975.23,1028.37 v3(1978.84,1031.97) ; v4(1948.45,1469.37) 1951.16,1469.37 1960.44,1460.09 1965.06,1460.09 1976.94,1448.22 1976.94,1434.22 1977.09,1434.07 2072.99,1434.07 2084.7,1445.78 2084.7,1551.69 2069.31,1567.08 2062.13,1574.26 U12.3 ; C17.2@2309.91,483.56 2309.91,489.97 C17.2@2310.24,489.97
  Top Layer w30: J4.1 1107.79,408.22 1107.79,466.33 1227.27,585.81 RV1.2 ; 1473.46,613.63 1509.93,613.63 U2.1
  Bottom Layer w20: U2.1 1625.41,729.11 v3(1625.41,868.66) 1625.09,868.98 1625.09,963.67 ; U1.3 1625.09,1045.07 1625.09,963.67 ; v4(1948.45,1469.37) 1948.45,1466.66 1978.84,1436.27 v3(1978.84,1031.97) 1910.54,963.67 1625.09,963.67
Lora_MCU_RXD: P6.7 P7.8 P10.2 | length 803.4
  Top Layer w15: P6.7 79.92,663.01 109.68,692.78 201.47,692.78 358.07,849.38 358.07,893.8 P7.8
  Bottom Layer w15: P7.8 443.55,902.23 572.15,1030.82 P10.2
Lora_MCU_TXD: P6.5 P7.7 P10.1 | length 733.8
  Top Layer w15: P6.5 179.92,611.97 192.49,624.55 193.27,624.55 396.94,828.21 433.91,828.21 P7.7
  Bottom Layer w15: P7.7 449.14,831.51 464.81,847.18 465.12,847.18 650.12,1032.18 650.12,1061.43 P10.1
Lora_Reset: P6.3 P7.6 | length 343.7
  Top Layer w15: P6.3 279.92,654.55 379.69,754.32 501.45,754.32 P7.6
LoseCurrent: C33.1 D1.2 D2.1 P3.2 R37.1 | length 1353.6
  Top Layer w12: P3.2@273.29,1337.26 P3.2 269.53,1339.99 288.53,1320.99 D1.2 ; v1(842.64,1848.69) 843.02,1848.31 902.87,1848.31 C33.1 904.95,1849.63 904.95,1906.55 R37.1
  Bottom Layer w12: v1(321.89,1320.99) 321.89,1752.68 417.9,1848.69 v1(842.64,1848.69)
MCU_BL0942_Control: P4.5 U12.2 | length 246.6
  Top Layer w10: U12.2 2480.93,1574.26 P4.5
NetC5_1: C5.1 L1.1 U3.2 | length 354.3
  Top Layer w30: U3.2 1027.43,950.06 1001.2,923.83 1001.2,854.77 1013.38,854.77 1027.62,840.54 1077.25,840.54 1094.82,822.96 1094.82,787.03 1122.76,759.09 L1.1@1122.76,717.83
NetC5_2: C5.2 U3.6 | length 86.6
  Top Layer w30: C5.2@933.97,861.5 933.97,902.23 936.2,900 C5.2
NetC32_1: C32.1 R38.1 R41.2 U8.2 | length 321.2
  Top Layer w10: R38.1 640.33,1988.2 609.66,1957.52 U8.2 609.66,1862.25 625.68,1846.22 R41.2 C32.1
NetC32_2: C32.2 R37.2 R41.1 U8.1 | length 182
  Top Layer w12: U8.1 R37.2
NetC36_1: C36.1 R43.2 R44.1 U8.5 | length 216
  Top Layer w12: C36.1 U8.5@505.81,1665.05 ; U8.5 505.81,1676.06 U8.5@505.81,1665.05 ; R43.2 538.28,1619.91 515.67,1619.91 505.81,1629.77 U8.5@505.81,1665.05
NetD5_2: D5.2 R22.1 R23.2 SC1.1 | length 842.1
  Top Layer w30: R22.1 1716.95,1409.24 1751.86,1444.15 1751.86,1505.61 D5.2 1776.86,1539.82 1842.98,1605.95 1858.49,1605.95 v2(1862.32,1609.77) ; R23.2 1852.36,1218.52 1852.36,1150.22 SC1.1
  Bottom Layer w30: v2(1862.32,1609.77) 1862.32,1140.27 SC1.1
NetD6_1: D6.1 R22.2 | length 151.9
  Top Layer w30: D6.1 1463.62,1330.1 1488.62,1355.1 1527.18,1355.1 1547.58,1375.5 1556.95,1375.5 1571.95,1390.5 R22.2
NetD7_2: D7.2 D8.1 F1.1 R29.2 R31.1 U7.7 | length 651.6
  Top Layer w15: R29.2 1296.5,1784.76 1356.16,1725.09 1387.06,1725.09 U7.7
  Top Layer w20: D7.2 1123.29,2013.07 1215.01,2013.07 1215.06,2013.02 1250.2,2013.02 1280.2,2043.02 1296.5,2026.72 R29.2 R31.1
NetD8_2: D8.2 D9.1 F2.1 R31.2 R32.1 U7.6 | length 619.5
  Top Layer w15: U7.6 1443.62,1772.75 1452.4,1781.54 1452.4,1858.57 1417.73,1893.24 R31.2
  Top Layer w20: R31.2 R32.1 ; R32.1 1473.14,2040.06 D8.2 1480.2,2043.02 1510.2,2013.02 1640.92,2013.02 D9.1
NetJ5_1: J5.1 R13.1 | length 97.2
  Top Layer w30: J5.1@1503.18,777.58 R13.1
NetJ6_1: J6.1 R14.1 | length 422.7
  Top Layer w30: J6.1 1317.31,849.64 1380.71,913.04 1554.97,913.04 1600.39,958.46 R14.1
NetLED1_1: LED1.1 R21.2 | length 70.7
  Top Layer w30: LED1.1 869.28,1397.78 879.14,1387.92 R21.2
NetP2_1: P2.1 R33.2 R35.2 | length 303.3
  Top Layer w12: R35.2 435.29,2055.03 435.29,2244.52 452.03,2261.26 P2.1 ; R35.2@442.73,2051.28 482.88,2051.28 R33.2@501.52,2032.64
NetQ1_1: Q1.1 R8.1 R9.1 | length 126.3
  Top Layer w20: Q1.1@2026.36,893.15 2030.14,889.37 R9.1@2081.65,889.37 ; R8.1@2038.72,954.39 2038.72,910.27 Q1.1@2026.36,897.92 ; Q1.1@2026.36,897.92 Q1.1 Q1.1@2026.36,897.92
NetQ1_3: Q1.3 U5.1 | length 125.7
  Top Layer w15: U5.1 1986.34,692.37 1988.96,694.99 Q1.3
NetR2_2: R2.2 R3.1 U3.4 | length 138.2
  Top Layer w15: R2.2@866.12,913.01 866.12,980.46 898.78,980.46 904.28,985.96 932.47,985.96 U3.4
NetR4_2: R4.2 R6.2 U4.6 | length 149.3
  Top Layer w20: U4.6 2314.69,1887.99 2314.69,1977.64 R6.2@2373.36,1977.64
NetR5_2: R5.2 R7.1 U4.3 | length 166.8
  Top Layer w20: U4.3 2392.01,1787.05 2392.01,1758.49 2410.25,1740.26 R7.1
NetR15_1: R15.1 R16.2 | length 81.5
  Top Layer w40: R15.1 1890.13,426.45 1962.14,426.45 1964.64,428.95 R16.2
NetR16_1: R16.1 R17.2 | length 89.5
  Top Layer w40: R16.1 2044.64,351.45 2047.88,348.2 R17.2
NetR17_1: R17.1 R18.2 | length 73
  Top Layer w30: R17.1 R18.2
NetR18_1: R18.1 R19.2 | length 76.6
  Top Layer w40: R18.1 2347.49,343.21 2350.99,339.71 R19.2
NetR23_1: R23.1 R24.2 SC1.2 SC2.1 | length 753.6
  Top Layer w30: R23.1 1932.36,1218.52 1932.36,1181.67 1973.9,1140.13 SC1.2 ; R24.2 2360.58,1225.51 2360.58,1163.54 SC2.1
  Bottom Layer w30: SC1.2 2061.29,1138.15 2061.29,1069.42 2078.87,1051.85 2326.76,1051.85 2373.75,1098.83 2373.75,1129.89 SC2.1
NetR25_2: R25.2 R35.1 U8.3 | length 277.6
  Top Layer w10: R35.1 434.38,1909.05 467,1876.43 472.03,1876.43 494.38,1854.08 551.62,1854.08 559.66,1862.11 U8.3
NetR46_2: R46.2 U10.1 | length 88
  Top Layer w10: U10.1 2298.2,1384.07 2326.25,1412.11 R46.2
NetR49_2: R49.2 U11.1 | length 85.8
  Top Layer w10: R49.2 1939.41,1310.89 1939.41,1304.38 1957.79,1286.01 1995.28,1286.01 U11.1
NetR50_2: R50.2 U12.1 | length 73.9
  Top Layer w10: U12.1 R50.2
Nin: J3.1 R15.2 RV1.1 U2.2 | length 971.5
  Top Layer w30: J3.1@1302.92,412.61 1307.41,408.12 1673.62,408.12 RV1.1 1741.14,342.83 1886.52,342.83 R15.2
  Bottom Layer w30: RV1.1 1731.86,349.9 1731.86,534.89 1773.75,576.78 U2.2
Relay_C_A: P4.3 R7.2 | length 156.3
  Top Layer w10: R7.2 2526.13,1669.24 2546.76,1669.24 2590.25,1625.75 2590.25,1564.94 P4.3
Relay_C_B: P4.1 R6.1 | length 703.2
  Top Layer w10: R6.1@2375.25,2030.52 2412.9,2030.52 2477.9,1965.52 2614.77,1965.52 2693.69,1886.6 P4.1
Relay_O_A: J1.1 U4.4 | length 286.7
  Top Layer w20: J1.1 2186.99,1928.28 2276.49,1838.77 2371.97,1838.77 2388.39,1855.18 2388.39,1885.48 U4.4
Relay_O_B: J2.1 U4.1 | length 154.4
  Top Layer w20: J2.1 2284.65,1748.28 2315.4,1779.02 U4.1
RS485_DIR: P3.3 R45.1 U7.2 U7.3 | length 2802.5
  Top Layer w15: P3.3 187.03,1578.99 187.03,1639.58 335.97,1788.52 335.97,2343.53 379.47,2387.03 740.1,2387.03 994.35,2132.78 994.35,1912.24 1153.19,1753.4 1153.83,1753.4 1297.46,1609.77 1473.9,1609.77 1584.54,1720.41 1615.41,1720.41 U7.2 U7.3 1620.1,1770.41 1651.14,1770.41 1674.77,1746.78 R45.1
RS485_RX: P3.1 R30.1 U7.1 | length 2658.2
  Top Layer w15: P3.1 269.53,1682.28 357.72,1770.47 357.72,2328.04 390.8,2361.12 730.3,2361.12 974.35,2117.07 974.35,1898.57 1283.15,1589.77 1494.67,1589.77 1577.65,1672.75 U7.1 1703.68,1672.75 1711.5,1680.57 R30.1
RS485_TX: P3.5 R28.1 U7.4 | length 2884
  Top Layer w15: P3.5 69.53,1591.61 310.74,1832.83 310.74,2352.55 370.47,2412.28 743.15,2412.28 1014.35,2141.07 1014.35,1927.7 1302.62,1639.43 1462.82,1639.43 1528.06,1704.68 1528.06,1777.07 1573.75,1822.75 U7.4 1703.24,1822.75 1710.74,1815.25 R28.1
VCC5.4: C8.2 C9.1 C10.2 D3.2 D6.2 L1.2 R2.1 | length 1758.3
  Top Layer w30: C8.2@781,762.62 835.98,762.62 890.75,762.62 894.28,759.09 939.4,759.09 966.21,732.28 L1.2 ; R2.1 732.76,921.14 ; C9.1@835.98,756.32 781,756.32 768.15,756.32 713.11,756.32 653.63,756.32 604.73,756.32 592.21,768.85 575.21,785.85 575.21,852.22 615.65,892.66 688.11,892.66 716.59,921.14 732.76,921.14 ; v2(913.7,1064.92) 765.23,1064.92 732.76,1032.45 732.76,921.14 ; v2(1261.5,1218.52) 1262.56,1219.58 1262.56,1319.83 D6.2 D3.2
  Bottom Layer w30: v2(913.7,1064.92) 1045.97,1064.92 1199.57,1218.52 v2(1261.5,1218.52)
VCC5_CAP: C18.2 D3.1 D5.1 P7.1 U6.3 | length 2076.2
  Top Layer w30: v2(971.22,1489.51) 971.5,1489.79 971.5,1595.06 U6.3 971.79,1695.28 974.41,1697.9 C18.2@974.41,1700.4 ; v2(1226.02,1555.84) 1362.53,1555.84 1429.41,1488.96 1438.62,1488.96 D3.1@1463.62,1463.96 ; D3.1 D3.1@1463.62,1463.96 ; D5.1 1576.86,1521.39 1551.86,1496.39 1505.26,1496.39 1497.83,1488.96 1488.62,1488.96 D3.1@1463.62,1463.96
  Bottom Layer w30: P7.1 861.48,427.8 856.86,432.42 856.86,701.97 833.81,725.02 833.81,1158.98 874.28,1199.45 874.28,1392.57 v2(971.22,1489.51) 1037.55,1555.84 v2(1226.02,1555.84)
VCC12: C3.1 C4.2 C6.2 C7.1 C11.2 C12.2 C23.1 P4.2 P5.1 U2.5 U3.3 U3.5 U4.5 | length 5764.5
  Top Layer w15: U4.5@2352.44,1887.65 2352.44,1923.12 2361.23,1931.91 2435.6,1931.91 2463.03,1904.47 C11.2 2590.72,1873.51 2643.89,1820.34 2643.89,1420.94 2693.69,1371.14 P4.2
  Top Layer w20: U3.5 971.17,950.06 1007.33,986.22
  Top Layer w30: 1007.33,986.22 U3.3@1050.84,986.22 ; U3.3@1056.77,986.46 1107.08,986.46 1113.38,980.16 C6.2 ; C6.2@1115.88,984.59 1186.89,984.59 C7.1 1193.6,983.04 1193.6,1064.41 v2(1196.17,1066.98) ; U2.5 2443.82,872.04 C3.1 2448,963.46 C4.2 2617.27,963.46 2693.69,1039.89 P4.2
  Top Layer w60: C23.1 1903.24,2209.4 1970.83,2276.98 2100.16,2276.98 P5.1
  Bottom Layer w30: v2(1196.17,1066.98) 1297.58,1066.98 1410.12,1179.53 1410.12,1390.39 1728.58,1708.85
  Bottom Layer w60: 1728.58,1708.85 1745.04,1708.85 ; C23.1 1778.29,2209.4 1699.81,2130.92 1699.81,1754.07 1736.81,1717.08 1758.61,1695.28 2121.68,1695.28 2265.7,1551.26 2265.7,1320.83 2294.53,1292 2318.52,1268.01 2592.89,1268.01 2667.97,1192.93 2667.97,1014.16 2604.92,951.11 2435.65,951.11 C3.1
VCC33: C1.1 C19.2 C20.2 C22.1 C24.2 C25.2 D1.1 D4.1 P6.2 R21.1 R28.2 R30.2 R32.2 R43.1 R46.1 R48.2 R50.1 U1.2 U6.2 U7.8 U8.8 | length 7120.7
  Top Layer w20: D1.1 499.47,1446.98 519.47,1466.98 v1(519.47,1518.1) 539.78,1538.41 539.78,1540.91 544.78,1545.91 R43.1 ; U8.8 659.66,1694.09 659.81,1694.25 v1(684.44,1694.25) C24.2 724.8,1693.81 724.8,1632.98 C25.2 ; D4.1 D4.1@1029.18,1123.21 ; U6.2@1061.94,1355.34 1111,1306.29 1172.23,1306.29 1186.89,1291.63 1186.89,1176.77 1244.17,1119.49 C1.1 1494.38,1119.49 1515.03,1098.83 1515.03,1055.13 U1.2 ; C22.1 1343.9,1672.91 1369.88,1672.91 1370.04,1672.75 U7.8 1452.08,1672.75 1494.38,1715.04 1494.38,1826.09 v3(1516.26,1847.97) 1538.14,1869.85 R32.2 1716.58,1926.51 1775.74,1867.35 R28.2 1838.82,1813.47 1873.27,1779.02 v3(1875.07,1779.02) 1875.07,1704.68 1853.47,1683.07 R30.2 ; R46.1 v4(2433.08,1414.61) ; R50.1 2392.53,1522.97 2431.79,1522.97 v4(2433.08,1521.68) ; R48.2 2393.3,1326.94 2398.3,1331.94 2423.46,1331.94 2433.42,1341.91 v4(2436.13,1341.91)
  Top Layer w30: R21.1 U6.2@990.15,1322.92 ; D4.1 1034.18,1123.21 1034.18,1147.61 1073.16,1186.59 C20.2 C19.2 1073.16,1271.44 1061.94,1282.66 U6.2@1061.94,1355.34 ; U6.2@1049.53,1342.93 U6.2@1061.94,1355.34 ; v3(1060.93,1737.03) 1061.44,1736.53 1061.44,1595.85 1061.94,1595.34 U6.2@1061.94,1355.34
  Top Layer w40: P6.2 379.92,366.71 379.99,366.79 427.33,366.79 v2(427.82,367.28) ; v2(724.54,1226.11) 943.22,1226.11 983.52,1266.41 983.52,1316.29 990.15,1322.92 1010.16,1342.93 U6.2@1049.53,1342.93
  Bottom Layer w20: v1(519.47,1518.1) 519.47,1632.63 575.21,1688.37 678.55,1688.37 v1(684.44,1694.25) 764.25,1694.25 806.37,1736.37 v3@1060.27,1736.37 ; v3(1875.07,1779.02) 2228.32,1779.02 2433.08,1574.26 v4(2433.08,1521.68) v4(2433.08,1414.61) 2434.6,1413.09 2434.6,1343.43 v4(2436.13,1341.91)
  Bottom Layer w30: v3(1060.93,1737.03) 1403.4,1737.03 1514.34,1847.97 v3(1516.26,1847.97)
  Bottom Layer w40: v2(427.82,367.28) 219.72,367.28 53.95,533.05 53.95,971.81 308.25,1226.11 v2(724.54,1226.11)
VCC33_G: C2.1 C13.2 C14.2 Q1.2 R8.2 R10.2 R11.2 R47.2 R49.1 R51.2 U1.4 U5.8 | length 1441.9
  Top Layer w20: C13.2@1853.87,960.53 1968.3,960.53 1973.3,955.53 R8.2 ; C13.2 1853.13,968.37 1828.23,968.37 1820.45,976.14 1811.28,976.14 1759.67,1027.76 1756.17,1027.76 1738.53,1045.39 U1.4 1726.88,1047.51 1726.88,1299.16 1736.98,1309.26 1855.29,1309.26 1864.41,1318.39 R49.1 1865.06,1321.54 1865.06,1521.68 R51.2 ; Q1.2@1951.51,894.03 1952.87,892.67 1952.87,861.37 1966.93,847.31 2032.47,847.31 2052.85,826.93 R11.2 ; Q1.2@1951.56,897.92 Q1.2 1955.34,897.76 1955.34,917.68 1968.3,930.64 1968.3,951.11 R8.2@1969.2,952.01 ; R11.2@2102.41,826.8 2102.41,649.82 2138.47,613.76 2189.71,613.76 U5.8
VDD_1.65V: C37.1 R25.1 U8.6 U8.7 | length 373.2
  Top Layer w12: R25.1 435.06,1840.87 466.47,1840.87 491.11,1816.23 522.05,1816.23 559.66,1778.63 U8.6 U8.7 610.08,1679.48 610.08,1612.35 C37.1
VP: C17.1 R19.1 R20.2 U5.4 | length 680.6
  Top Layer w15: U5.4 2053.33,574.26 2128.78,498.81 2245.7,498.81 2254.48,507.6 2254.48,583.05 2263.27,591.84 2362.93,591.84 2371.71,583.05 R20.2
  Top Layer w30: R19.1 2360.99,419.71 2368.49,427.21 2368.49,441.82 2371.46,444.79 2371.46,478.43 2369.91,479.97 C17.1 ; C17.1@2372.41,482.47 R20.2@2372.41,531.96
pads on no net: P3.4 P3.6 P8.1 P8.2 P8.3 P8.4 P8.5 P8.6 U5.6 U5.7

## Polygon pours and split planes (outlines as drawn)
GND on Top Layer "GND_L01_P000" (solid, remove dead copper, pour order 0): 0,295.28 9,304.28 979.95,304.28 979.95,440.42 1180.45,640.91 1180.45,783.39 1250.54,853.48 1250.54,971.71 1263.94,985.11 1455.54,985.11 1473.09,1002.66 1473.09,1140.8 1558.9,1226.62 2086.4,1226.62 2252.37,1060.65 2252.37,686.03 2320.99,617.42 2322.35,618.78 2421.63,618.78 2443.82,596.59 2443.82,187.46 2458.01,173.28 2994.95,173.28 2994.95,2677.28 2707.95,2964.28 142.95,2964.28 142.95,2892.28 -376.05,2373.28 -270.05,2267.28 -270.05,394.28 -99,394.28
GND on Bottom Layer "GND_L02_P001" (solid, remove dead copper, pour order 1): 0,295.28 9,304.28 979.95,304.28 979.95,440.42 1180.45,640.91 1180.45,783.39 1250.54,853.48 1250.54,971.71 1263.94,985.11 1455.54,985.11 1473.09,1002.66 1473.09,1140.8 1558.9,1226.62 2086.4,1226.62 2252.37,1060.65 2252.37,686.03 2320.99,617.42 2322.35,618.78 2421.63,618.78 2443.82,596.59 2443.82,187.46 2458.01,173.28 2994.95,173.28 2994.95,2677.28 2707.95,2964.28 142.95,2964.28 142.95,2892.28 -376.05,2373.28 -270.05,2267.28 -270.05,394.28 -99,394.28

## Keep-outs
Keep-Out Layer:
  circle w10: c2598.43,807.09 r49.21
  circle w10: c157.48,807.09 r49.21
  lines w10: 0,295.28 0,2027.56 275.59,2027.56 275.59,2460.63 1653.54,2460.63 1653.54,2307.45 1881.42,2307.45 1918.79,2307.45 1918.79,2460.13 1919.3,2460.63 2480.31,2460.63 2480.31,2027.56 2755.91,2027.56 2755.91,295.28 0,295.28
  lines w30: 1029.93,362.36 1029.93,456.93 1213.62,640.62 1213.62,775.08 1271.89,833.35 1271.89,927.4 1302.95,958.46 1515.77,958.46 1515.95,958.28 ; 1165.04,328.36 1165.04,426.19 1232.37,493.53 1614.92,493.53 ; 1266.11,664.43 1450.78,664.43 ; 1574.78,1014.84 1574.78,1199.45 ; 1674,637.64 1674,692.75 1714.35,733.1 1804.81,733.1 1835.44,702.48 1835.44,624.54 1826.86,615.96 ; 2053.33,768.86 2053.33,639.5 2120.37,572.46

## Silkscreen, mask and mechanical layers (free items; w line width, h text height)
Top Overlay:
  circle w10: c157.48,807.09 r78.74
  circle w10: c2598.43,807.09 r78.74
  lines w10: 354.33,2462.13 748.03,2462.13 ; 1181.1,2460.63 1574.8,2460.63 ; 2007.87,2460.13 2401.57,2460.13
  lines w11.81: 0,0 0,1629.77 2755.91,1629.77 2755.91,0 0,0
  text "漏电流" at 802.05,2406.83 h78.74 r270
  text "RS485" at 944.74,2390.89 h78.74 r270
  text "B  A" at 1013.59,2388.67 h80
  text "12V+" at 2001.16,2037.95 h80
  text "V-" at 2198.09,2037.85 h80
  text "A" at 2041.77,1901.06 h90
  text "继电器" at 1890.14,1822.99 h90
  text "B" at 2042.71,1717.83 h90
  text "4P单相底板-V1" at 24.57,1192.92 h90
  text "2026-01-12" at 28.71,1114.83 h90
  text "正" at 1294.49,874.52 h70
  text "负" at 1442.04,874.3 h70
  text "采样电阻" at 1283.77,821.39 h60
  text "Lin" at 1151.27,458.32 h90 r45
  text "Nin" at 1201.62,431.85 h90 r270
Bottom Overlay:
  text "RS485" at 1478.09,2361.12 h80
  text "12V 输出" at 2371.97,2361.12 h80
  text "漏电流" at 669.72,2343.28 h80
  text "A    B" at 1497.83,2143.42 h80
  text "负    正" at 2361.41,2138.58 h80

## Text inside footprints (layer, text, board x,y; h text height)
C3: Top Overlay "+" at 2414.2,886.67 h60 r180
C23: Top Overlay "+" at 1898.07,2223.4 h60 r270
SC1: Bottom Overlay "+" at 1839.88,1193.54 h78.74; Bottom Overlay "-" at 2037.88,1194.03 h78.74
SC2: Bottom Overlay "+" at 2361.41,1193.54 h78.74; Bottom Overlay "-" at 2559.41,1194.03 h78.74
U2: Bottom Overlay "GND" at 2318.95,481.92 h100 r270; Bottom Overlay "V+" at 2400.95,511.28 h100 r270; Bottom Overlay "ACL" at 1552.94,777.58 h100 r270; Bottom Overlay "ACN" at 1751.77,777.58 h100 r270